# Altium PCB mainboardver2.PcbDoc
Units mil, origin at the board's own origin, x right, y up, seen from the top; angles counter-clockwise.
Board outline 3335 x 3855 mil, 2 copper layers (Top Layer, Bottom Layer); 28 components, 43 nets, 139 pads, 0 vias.
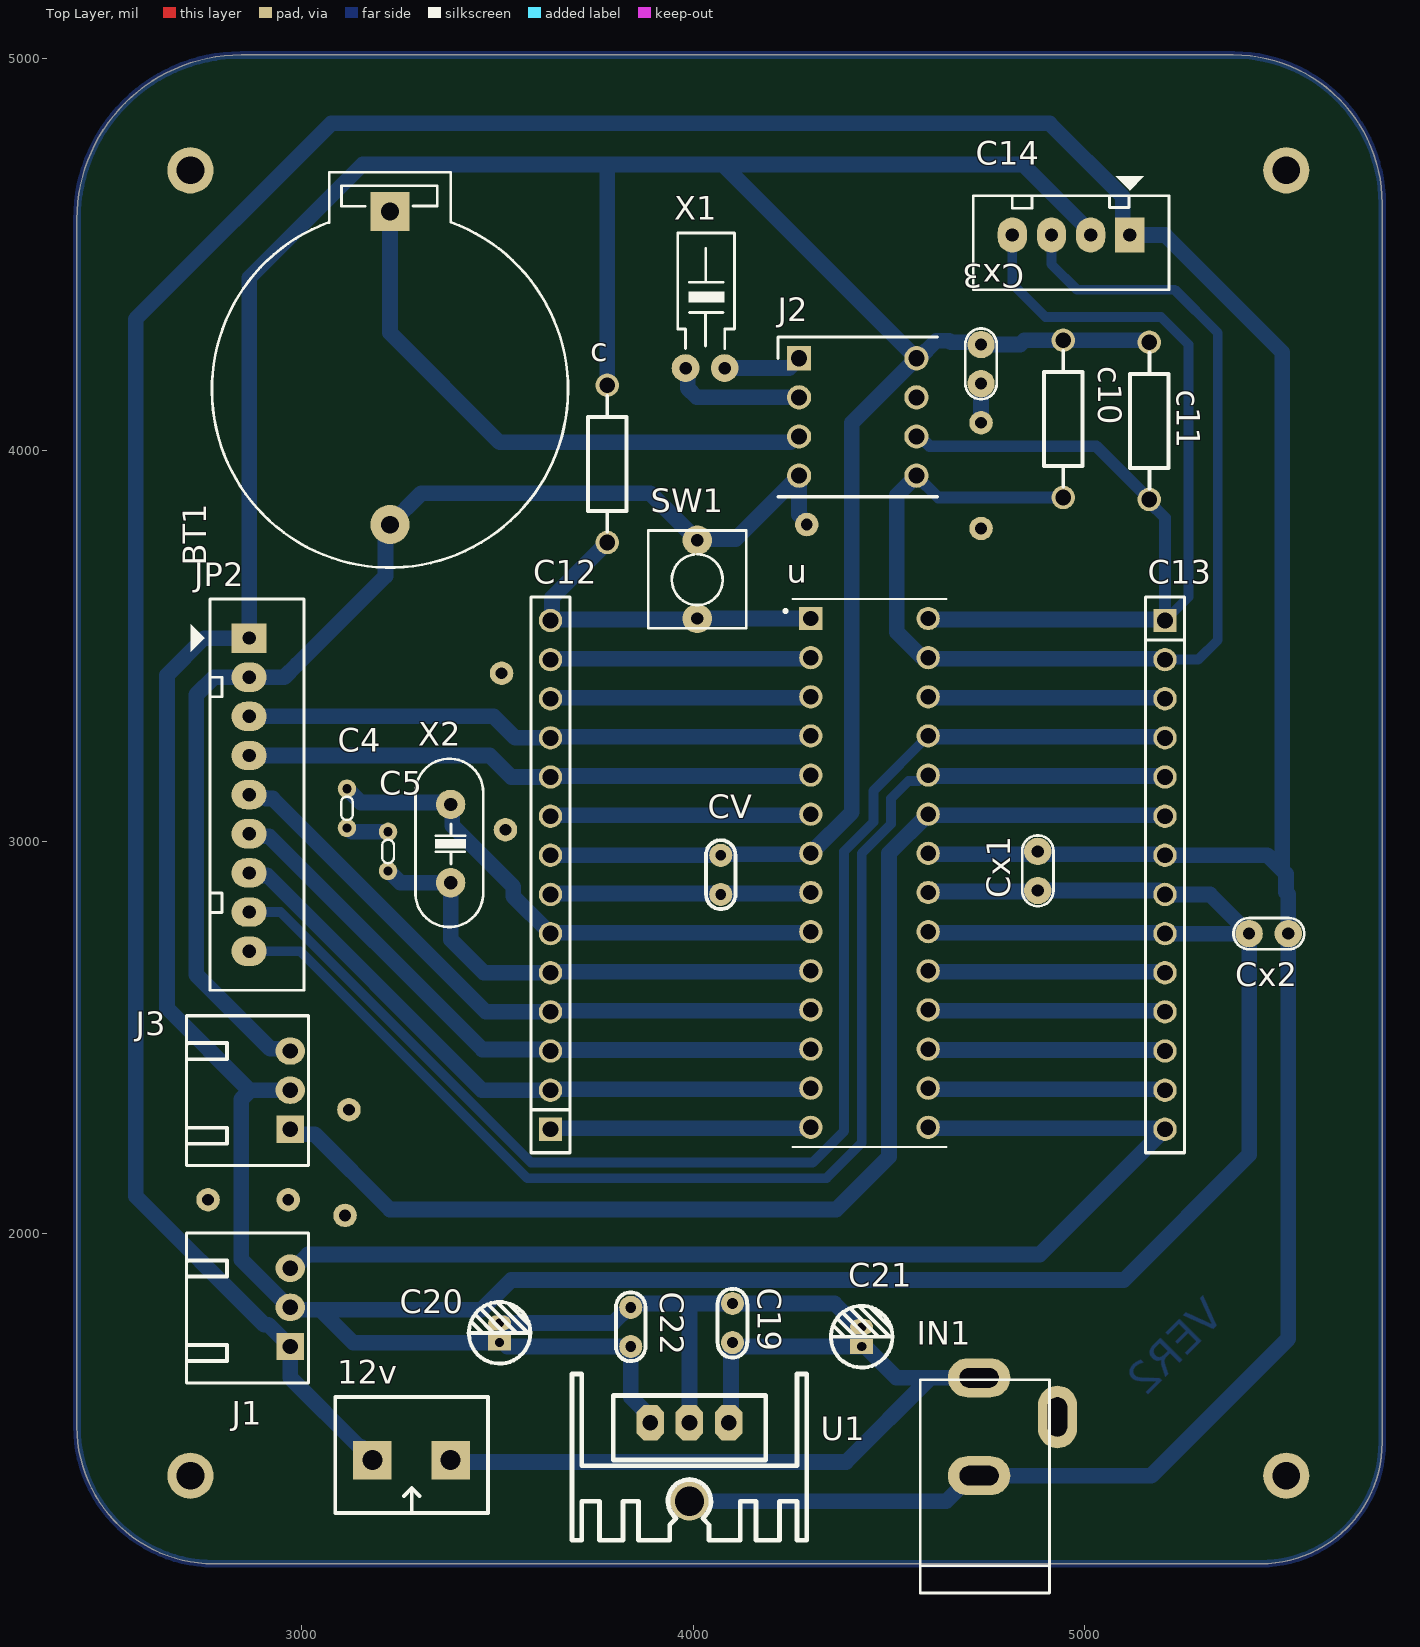
[diagram p0: Top Layer view]
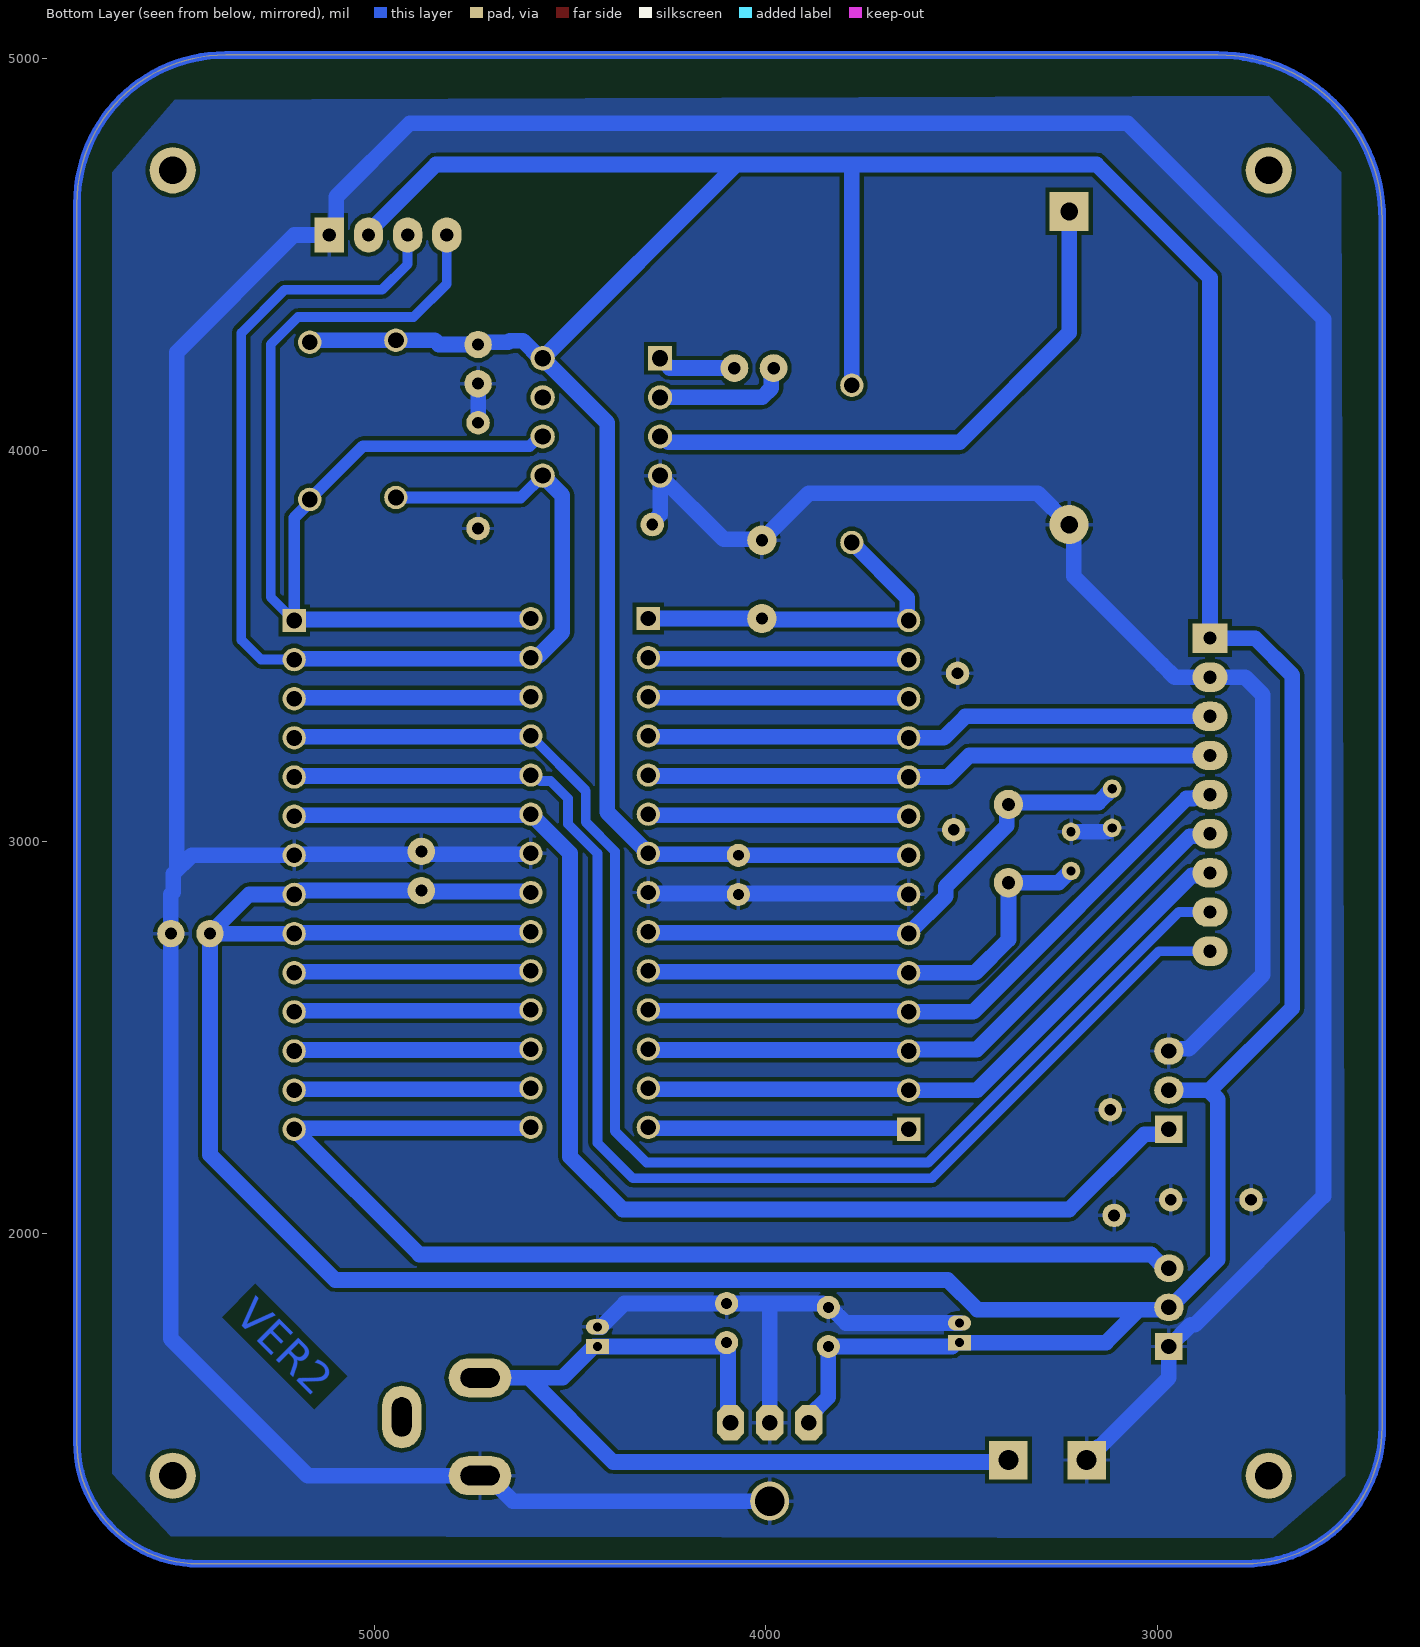
[diagram p1: Bottom Layer view, seen from below]
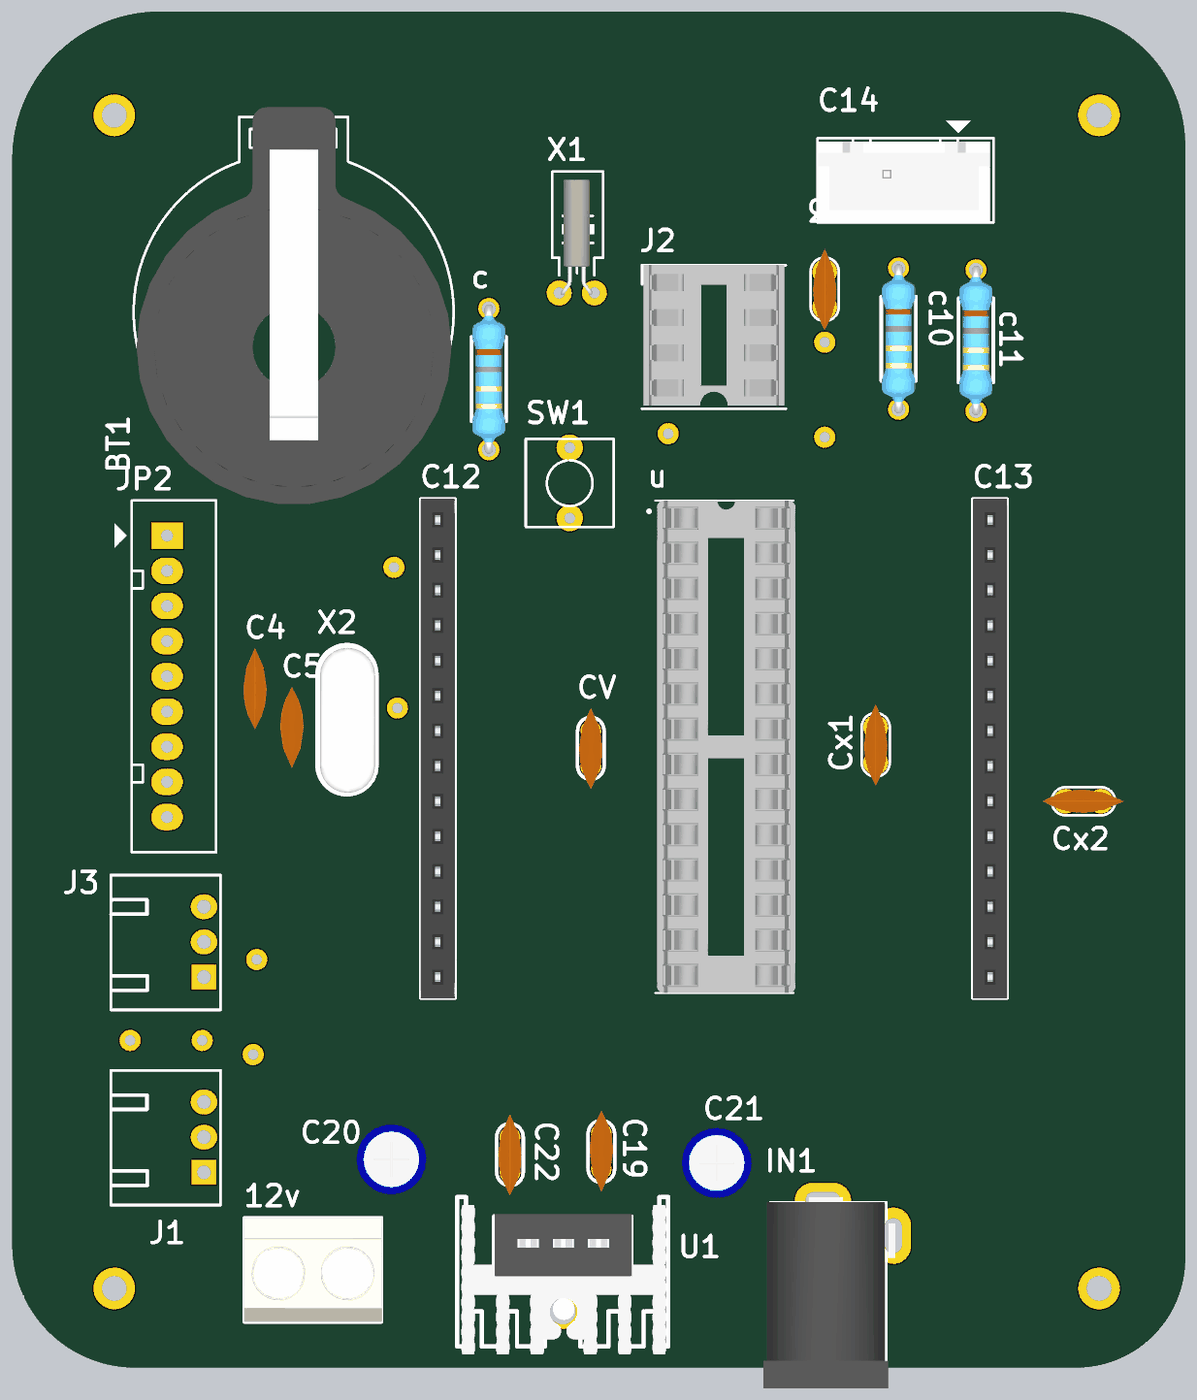
[diagram p2: 3D render of the assembled board from above, using the file's embedded part models]

## Layer stack, top to bottom
Top Solder: solder mask 0.4, Solder Resist, Dk 3.5
Top Layer: signal copper 1.4
Dielectric 1: dielectric 12.6, FR-4, Dk 4.8
Bottom Layer: signal copper 1.4
Bottom Solder: solder mask 0.4, Solder Resist, Dk 3.5

## Board outline
2425,1505 ccw(c2775,1505) 2775,1155 5450,1155 ccw(c5450,1465) 5760,1465 5760,4630 ccw(c5380,4630) 5380,5010 2845,5010 ccw(c2845,4590) 2425,4590

## Design rules (kind name [scope] priority, off if disabled: settings)
Clearance [All] p1: gap=10 ignorepadtopadclearanceinfootprint=FALSE except(0: Arc-Hole Track-Hole SMDPad-Hole THPad-Hole Via-Hole Fill-Hole Poly-Hole Region-Hole Text-Hole)
PolygonConnect [All] p1: connectstyle=Relief reliefconductorwidth=10 reliefentries=4 polygonreliefangle="90 Angle" airgapwidth=10
RoutingVias [All] p1: holewidth=28 width=50 viastyle="Through Hole" minholewidth=28 minwidth=50 maxholewidth=28 maxwidth=50
SolderMaskExpansion [All] p1: expansion=4 istentingtop=FALSE
Width [All] p1: maxlimit=40 minlimit=20 preferedwidth=25
30 further rules are at their usual default settings.

## Components (designator, comment, footprint, x,y, rotation, side; value= is the part's Value field where it differs from the comment)
12v "KF2" KF2-5.08 3280,1420 r180 top
BT1 "PIN 3V" PIN3V 3225,4610 r270 top
c "100K" "tro vach 1/4w" 3780,3965 r90 top
C4 "MH" Tu-pico 3115,3135 r270 top value=33p
C5 "MH" Tu-pico 3220,2925 r90 top value=33p
c10 "4,7K" "tro vach 1/4w" 4945,4080 r90 top
c11 "4,7K" "tro vach 1/4w" 5165,4075 r90 top
C12 "JP14" JP14-C1T 3635,2265 r90 top
C13 "JP14" JP14-C1T 5205,3565 r270 top
C14 "Header4" Header4 5115,4550 r180 top
C19 "104" "tu gom" 4100,1770 r90 top
C20 "10uF" "tu hoa 4mm" 3505,1745 r90 top
C21 "10uF" "tu hoa 4mm" 4430,1735 r90 top
C22 "104" "tu gom" 3840,1760 r270 top
CV "104" "tu gom" 4070,2915 r270 top
Cx1 "104" CN1 4880,2925 r90 top value=33pF
Cx2 "104" CN1 5470,2765 r0 top value=33pF
Cx3 "104" CN1 4735,4220 r90 top value=33pF
IN1 "Jac DC" DC0 4830,1505 r90 top
J1 "relay" "Header_Duc Cong_3P 2.54" 2970,1710 r270 top
J2 "A_08-LC-TT" DIPS762W61P254L1016H525Q8N 4270,4235 r0 top
J3 "sensor header" "Header_Duc Cong_3P 2.54" 2970,2265 r270 top
JP2 "JP9" Header9 2865,3520 r270 top value="Connector 9"
SW1 "" SW2 4010,3570 r90 top
u "1-2199298-9" DIP762W60P254L3556H510Q28 4450,2920 r0 top
U1 "LM7805" QTO-220H3 4090,1515 r180 top
X1 "32k" XT32k 3980,4210 r90 top value=4Mhz
X2 "16Mhz" XT2 3380,2995 r90 top value=4Mhz

## Footprints (in the part's own frame and the unit in brackets; to place one, negate y for a bottom-side part, rotate by r counter-clockwise, add the part's x,y. Pads: shape width x height; smd on the part's side, far side on the other; paste and mask are expansions set on the pad)
CN1 [mil]
  round 70 hole 31: 1(-50,0) 2(50,0)
  silkscreen extent -90,-40 91,40, body extent -115,-33 115,33, height 265
DC0 [mil] "Jac DC input"
  oval 100x160 hole 50 slot 100 at 90 deg: 1(125,100) 2(-125,100)
  oval 160x100 hole 50 slot 100 at 0 deg: 3(25,-100)
  silkscreen extent -425,-80 120,250, body extent -410,-105 134,269, height 434
DIP762W60P254L3556H510Q28 [mm]
  rect 1.508x1.508 hole 1: 1(-3.81,16.51)
  round 1.508 hole 1: 2(-3.81,13.97) 3(-3.81,11.43) 4(-3.81,8.89) 5(-3.81,6.35) 6(-3.81,3.81) 7(-3.81,1.27) 8(-3.81,-1.27) 9(-3.81,-3.81) 10(-3.81,-6.35) 11(-3.81,-8.89) 12(-3.81,-11.43) 13(-3.81,-13.97) 14(-3.81,-16.51) 15(3.81,-16.51) 16(3.81,-13.97) 17(3.81,-11.43) 18(3.81,-8.89) 19(3.81,-6.35) 20(3.81,-3.81) 21(3.81,-1.27) 22(3.81,1.27) 23(3.81,3.81) 24(3.81,6.35) 25(3.81,8.89) 26(3.81,11.43) 27(3.81,13.97) 28(3.81,16.51)
  silkscreen extent -5.55,-17.78 5,17.78, body extent -4.87,-17.78 5.13,17.78, height 5
DIPS762W61P254L1016H525Q8N [mm]
  rect 1.575x1.575 hole 1.05: 1(0,0)
  round 1.575 hole 1.05: 2(0,-2.54) 3(0,-5.08) 4(0,-7.62) 5(7.62,-7.62) 6(7.62,-5.08) 7(7.62,-2.54) 8(7.62,0)
  silkscreen extent -1.37,-8.99 8.99,1.37, body extent -1.27,-8.76 8.89,1.4, height 4.81
Header4 [mil] "CON4"
  rect 75x90 hole 34: 1(0,0)
  oval 75x90 hole 34: 2(100,0) 3(200,0) 4(300,0)
  silkscreen extent -100,-150 400,140, body extent -90,-90 398,136, height 276
Header9 [mil] "CON9"
  rect 75x90 hole 34: 1(0,0)
  oval 75x90 hole 34: 2(100,0) 3(200,0) 4(300,0) 5(400,0) 6(500,0) 7(600,0) 8(700,0) 9(800,0)
  silkscreen extent -100,-150 900,140
"Header_Duc Cong_3P 2.54" [mil]
  rect 70x70 hole 39.37 unplated: 1(0,0)
  oval 70x75 hole 39.37 unplated: 2(-100,0) 3(-200,0)
  silkscreen extent -290,-265 93,47
JP14-C1T [mm] "14 row, straight, gold plating"
  rect 1.52x1.52 hole 1.02: 1(0,0)
  round 1.52 hole 1.02: 2(2.54,0) 3(5.08,0) 4(7.62,0) 5(10.16,0) 6(12.7,0) 7(15.24,0) 8(17.78,0) 9(20.32,0) 10(22.86,0) 11(25.4,0) 12(27.94,0) 13(30.48,0) 14(33.02,0)
  silkscreen extent -1.52,-1.27 34.54,1.27, body extent -1.52,-1.25 34.54,1.25, height 8.51
KF2-5.08 [mm]
  rect 2.5x2.5 hole 1.3: 1(-2.54,0) 2(2.54,0)
  silkscreen extent -4.95,-4.08 4.95,3.43, body extent -5,-4.07 5,3.43, height 10
PIN3V [mil] "Socket PIN 3V"
  rect 100x100 hole 45: 1(0,0)
  round 100 hole 45: 2(800,0)
  silkscreen extent -100,-455 910,455, body extent -128,-447 1002,449, height 278
QTO-220H3 [mil] "TO-220 1-2-3"
  oct 70x90 hole 40: 1(0,0) 2(100,0) 3(200,0)
  round 100 hole 75: 2(100,200)
  silkscreen extent -200,-125 400,300, body extent -194,-102 388,323, height 984
SW2 [mil] "SW button 2pin, 250x 250 mil"
  round 75 hole 31: 1(0,0) 2(200,0)
  silkscreen extent -25,-125 225,125
"tro vach 1/4w" [mm]
  round 1.52 hole 1.02: 1(-5.1,0) 2(5.1,0)
  silkscreen extent -4.39,-1.25 4.42,1.25, body extent -5.38,-1.2 5.38,1.2, height 2.41
"tu gom" [mm] "Tu gom mini"
  round 1.5 hole 0.7: 1(-1.27,0) 2(1.27,0)
  silkscreen extent -2.25,-0.97 2.22,0.97, body extent -2.92,-0.85 2.92,0.85, height 6.12
"tu hoa 4mm" [mm]
  rect 1x1.5 hole 0.6: 1(-0.635,0)
  oval 1x1.5 hole 0.6: 2(0.635,0)
  silkscreen extent -2,-2 2.01,2.01, body extent -2.47,-2.47 2.58,2.58, height 14.81
Tu-pico [mm] "Tu gom mini"
  round 1.2 hole 0.6: 1(0,0) 2(2.54,0)
  silkscreen extent 0.51,-0.38 2.03,0.38, body extent -1.65,-0.85 4.19,0.85, height 6.12
XT2 [mil] "Footpin for Crystal 2 pin"
  round 75 hole 34: 1(-100,0) 2(100,0)
  silkscreen extent -213,-83 217,90, body extent -216,-87 216,90, height 144
XT32k [mm]
  round 1.8 hole 0.813: 1(0,0) 2(0,-2.54)
  silkscreen extent 1.27,-3.17 8.76,0.51, body extent -0.15,-2.42 8.2,-0.12, height 1.95

## Part data
12v: Manufacturer="Würth Elektronik eiSos GmbH", partNo=691103110002, ComponentLink1 Description=Manufacturer, ComponentLink1URL=http://www.we-online.com, ComponentLink2 Description=Datasheet, ComponentLink2URL=http://katalog.we-online.de/em/datasheet/6911031100xx.pdf, Created by="Karrer Zheng", Created Date="29 October 2013", NoPins=2
BT1: "Battery 3VDC"
c c10 c11: library part "Tro Vach 1/4W 5% 10k", "Căm", Chung_Loai=Cắm, Don_Vi=Con, Ma_Hang=MH007354, So_Chan=2, Ten_Linh_Kien="Trở Vạch 1/4w 5% 10K"
C4 C5: library part "Tu 33pF", "Cắm"
C12 C13: "WR-PHD 2.54 mm Angled Socket Header", Manufacturer="W¨¹rth Elektronik eiSos GmbH", partNo=613014143121, ComponentLink1 Description=Manufacturer, ComponentLink1URL=http://www.we-online.com, ComponentLink2 Description=Datasheet, ComponentLink2URL=http://katalog.we-online.de/em/datasheet/6130xx143121.pdf, Created by="Karrer Zheng", Created Date="29 March 2013", NoPins=14
C14: "Header IDC, 4 x 1 Pin Vertical 2.54mm Pitch (Non-Boxed, Male)", Manufacturer="W¨¹rth Elektronik eiSos GmbH", partNo=613002143121, ComponentLink1 Description=Manufacturer, ComponentLink1URL=http://www.we-online.com, ComponentLink2 Description=Datasheet, ComponentLink2URL=http://katalog.we-online.de/em/datasheet/6130xx143121.pdf, Created by="Karrer Zheng", Created Date="29 March 2013", NoPins=02
C19 C22 CV: library part "Tu gom 104 50V", "Cắm", Chung_Loai=Cắm, Don_Vi=Con, Ma_Hang=MH004761, So_Chan=2, Ten_Linh_Kien="Tụ gốm 104 100nF 50V"
C20 C21: library part "Tu Hoa 10uF 16V 4x7", "Cắm", Chung_Loai=Cắm, Don_Vi=Con, Ma_Hang=MH006855, So_Chan=2, Ten_Linh_Kien="Tụ Hóa 10uF 16V"
Cx1 Cx2 Cx3: library part CN0, "Cremic For Xtal 1pF => 100pF"
IN1: library part DCIN, "Jac DC input"
J1 J3: library part "Header 1_2.54_3P", "Cắm", Chung_Loai=Cắm
J2: "8 (2 x 4) Pos DIP, 0.3 (7.62mm) Row Spacing Socket Tin Through Hole", Package=None, Availability=Unavailable, MF="Assmann WSW Components", MP="A 08-LC-TT", Price=None, SnapEDA_Link=https://www.snapeda.com/parts/A%2008-LC-TT/Assmann%20WSW%20Components/view-part/3092960/?ref=snap
JP2: library part Header9, "Connector 9"
SW1: library part "Nut Nhan 2 Chan ( Dip )", "Cắm", Chung_Loai=Cắm, Don_Vi=Con, Ma_Hang=MH001959, Ten_Linh_Kien="Nút Nhấn 2 Chân 6x6x5MM DIP"
u: "28P,DIP SKT,300 CL,LDR,PB FREE", Package="PDIP-28 TE Connectivity", Centerline_Pitch="2.54 mm[.1 in]", ComponentLink1Description="New link", Digi-Key_Part_Number=A120353-ND, EU_RoHS_Compliance=Compliant, MF="TE Connectivity", MP=1-2199298-9, Number_of_Positions=28, Product_Type=Socket, SnapEDA_Link=https://www.snapeda.com/parts/1-2199298-9/TE%20Connectivity%20AMP%20Connectors/view-part/1265789/?ref=snap
U1: library part LM78xx, "On ap +, from + 5 to + 24VDC"
X1 X2: library part XT2, "Crystal, 32.768 KHz, -40 to 85 degC, 3.2 x 1.5 x 0.9 mm SMD"

## Free pads (board coordinates)
  round 60 hole 30: 9(2760,2085) 9(2965,2085) 9(3110,2045) 9(3120,2315) 9(3510,3430) 9(3520,3030) 9(4290,3810) 9(4735,3800) 9(4735,4070)
  round 118.11 hole 70.87: 14(2715,1380) 14(2715,4715) 14(5515,1380) 14(5515,4715)

## Nets (pads, with @x,y where several pads share a name; then routed paths per layer and width w, separated by ;. In a path a pad name is that pad's centre, name@x,y a point inside that pad or via, vN(x,y) a via of type N, cw(c..) or ccw(c..) an arc to the next point about the centre after c; other vN are vias at no path point)
Net12v_1: 12v.1 C19.1 C21.1 IN1.1 U1.1 | length 2192.5
  Bottom Layer w40: 12v.1 3385,1415 4390,1415 4605,1630 ; U1.1 4096.35,1521.35 4096.35,1716.35 C19.1 4105.16,1720 4115.16,1710 C21.1 4439.21,1710 4519.21,1630 4605,1630 ; IN1.1 4605,1630
Net12v_2: 12v.2 BT1.2 C4.2 C5.2 C12.7 C13.7 C14.1 C19.2 C20.2 C21.2 C22.1 CV.2 Cx1.2 Cx2.2 Cx3.1 IN1.2 J1.1 J2.4 J3.3 JP2.2 pad.9@2760,2085 pad.9@2965,2085 pad.9@3110,2045 pad.9@3120,2315 pad.9@3510,3430 pad.9@3520,3030 pad.9@4735,3800 SW1.2 U1.2 u.8 u.22 | length 17023.9
  Bottom Layer w40: J3.3 2964.26,2470.74 2919.26,2470.74 2730,2660 2730,3375 2775,3420 JP2.2 2955,3420 2987.5,3452.5 3213.52,3678.52 3213.52,3798.52 BT1.2 3305,3890 3890,3890 SW1.2 4012.5,3772.5 4107.5,3772.5 J2.4 4270,3835.41 4290,3815.41 4290,3810 ; C4.2@3116.39,3033.61 C4.2 3116.96,3035 3126.96,3025 C5.2 ; 12v.2@3150.79,1454.21 12v.2@3150.79,1449.21 ; 12v.2 12v.2@3150.79,1449.21 ; C20.2 3794.84,1770 3834.84,1810 C22.1 3845.16,1810 3855.16,1820 3977.58,1820 ; C12.7 3637.5,2867.5 4055,2867.5 4297.5,2867.5 u.8 ; U1.2@3990,1315 4646.57,1315 4711.57,1380 5170,1380 5520,1730 Cx2.2 5520,2865 5514.26,2870.74 5514.26,2917.31 5466.57,2965 C13.7 5202.5,2967.5 4880,2967.5 4602.5,2967.5 u.22 ; U1.2@3990,1515 3990,1807.58 3977.58,1820 ; C21.2 4420.79,1760 4360.79,1820 C19.2 3977.58,1820 ; 4735,4070 Cx3.1 ; 5505,2926.57 5505,4250 5205,4550 C14.1 5097.5,4567.5 5097.5,4647.5 4910,4835 3075,4835 2575,4335 2575,2094.29 2903.55,1765.74 2914.26,1765.74 J1.1 2970,1630 12v.2@3150.79,1449.21
NetBT1_1: BT1.1 J2.3 | length 1477.2
  Bottom Layer w40: BT1.1 3225,4300 3505,4020 4249.04,4020 4264.04,4035 J2.3
NetC3_1: C12.1 u.14 | length 667.1
  Bottom Layer w40: C12.1 3637.5,2267.5 4297.5,2267.5 u.14
NetC3_2: C12.2 JP2.7 u.13 | length 1667
  Bottom Layer w40: JP2.7 2871.7,2913.3 2911.7,2913.3 3460,2365 C12.2 3637.5,2367.5 4297.5,2367.5 u.13
NetC3_3: C12.3 JP2.6 u.12 | length 1667
  Bottom Layer w40: JP2.6 2871.7,3013.3 2916.7,3013.3 3461.2,2468.8 3631.2,2468.8 C12.3 3637.5,2467.5 4297.5,2467.5 u.12
NetC3_4: C12.4 JP2.5 u.11 | length 1667
  Bottom Layer w40: JP2.5 2871.7,3113.3 2903.95,3113.3 2907.25,3110 2925,3110 3470,2565 C12.4 3637.5,2567.5 4297.5,2567.5 u.11
NetC3_5: C5.1 C12.5 u.10 X2.1 | length 1274.7
  Bottom Layer w40: C5.1 3221.96,2925 3251.96,2895 X2.1 3380,2750 3465,2665 C12.5 3637.5,2667.5 4297.5,2667.5 u.10
NetC3_6: C4.1 C12.6 u.9 X2.2 | length 1384.3
  Bottom Layer w40: C4.1 3150,3100 3375,3100 3383.94,3091.06 3383.94,3041.06 3540,2885 3540,2860 C12.6 3637.5,2767.5 4297.5,2767.5 u.9
NetC3_8: c10.2 c11.2 C12.8 C13.8 C13.9 C14.2 C20.1 C22.2 c.2 CV.1 Cx1.1 Cx2.1 Cx3.2 J1.2 J2.8 J3.2 JP2.1 U1.3 u.7 u.20 u.21 | length 15249.7
  Bottom Layer w40: 2866.72,2363.28 2655,2575 2655,3425 2750,3520 JP2.1 2865,4440 3155,4730 3780,4730 ; J3.2 2868.43,2365 2845,2341.57 2845,1932.5 2967.5,1810 J1.2 2975.74,1804.26 3046.45,1804.26 ; C12.8@3637.5,2967.5 C12.8 CV.1 4072.5,2967.5 4297.5,2967.5 u.7 4405,3075 4405,4070 J2.8 ; c.2 3780,4730 ; U1.3 3890,1530.78 3840,1580.78 C22.2 3524.21,1710 3514.21,1720 C20.1 3130.71,1720 3046.45,1804.26 ; u.20 4602.5,2767.5 5202.5,2767.5 C13.9 Cx2.1 ; u.21@4602.5,2867.5 u.21 4602.5,2872.5 4877.5,2872.5 Cx1.1 5189.63,2875 5199.63,2865 C13.8 ; C14.2 5015,4557.5 4842.5,4730 4075,4730 ; c11.2 5160.91,4275.79 5155.91,4280.79 c10.2 4845.96,4280.79 4835.17,4270 Cx3.2 4729.26,4275.74 4658.35,4275.74 4654.09,4280 4620.96,4280 4575.96,4235 J2.8 ; C13.8@5202.5,2867.5 C13.8 ; 3046.45,1804.26 3459.15,1804.26 3534.89,1880 5100,1880 5420,2200 Cx2.1 ; 3780,4730 4075,4730 ; 4075,4730 J2.8 ; C13.8 5320,2865 Cx2.1
NetC3_9: C12.9 u.6 | length 667.1
  Bottom Layer w40: C12.9 3637.5,3067.5 4297.5,3067.5 u.6
NetC3_10: C12.10 JP2.4 u.5 | length 1459.9
  Bottom Layer w40: JP2.4 3480,3220 3535,3165 C12.10 3637.5,3167.5 4297.5,3167.5 u.5
NetC3_11: C12.11 JP2.3 u.4 | length 1459.9
  Bottom Layer w40: JP2.3 3490,3320 3545,3265 C12.11 3637.5,3267.5 4297.5,3267.5 u.4
NetC3_12: C12.12 u.3 | length 667.1
  Bottom Layer w40: C12.12 3637.5,3367.5 4297.5,3367.5 u.3
NetC3_13: C12.13 u.2 | length 667.1
  Bottom Layer w40: C12.13 3637.5,3467.5 4297.5,3467.5 u.2
NetC3_14: C12.14 c.1 SW1.1 u.1 | length 922.8
  Bottom Layer w40: C12.14 C12.14@3637.5,3567.5 ; c.1 3638.8,3623.01 3638.8,3568.8 C12.14@3637.5,3567.5 ; u.1 SW1.1 4007.5,3567.5 C12.14@3637.5,3567.5
Netc8_1: 
NetC9_1: c11.1 C13.1 C14.4 J2.6 u.28 | length 2963.5
  Bottom Layer w25: C14.4 4815,4425 4900,4340 5195,4340 5265,4270 5265,3625 C13.1
  Bottom Layer w30: J2.6 4578.58,4035 4603.58,4010 5029.21,4010 c11.1 5165,3867.42 5205,3827.42 C13.1
  Bottom Layer w40: u.28 4602.5,3567.5 5202.5,3567.5 C13.1
NetC9_2: c10.1 C13.2 C14.3 J2.5 u.27 | length 3046
  Bottom Layer w25: C14.3 4915,4475 4980,4410 5230,4410 5340,4300 5340,3515 5290,3465 C13.2
  Bottom Layer w30: J2.5 4625.79,3879.21 c10.1
  Bottom Layer w40: J2.5 4520,3885 4520,3535 4581.29,3473.71 4596.29,3473.71 4602.5,3467.5 5202.5,3467.5 C13.2
NetC9_3: C13.3 u.26 | length 607.1
  Bottom Layer w40: u.26 4602.5,3367.5 5202.5,3367.5 C13.3
NetC9_4: C13.4 JP2.8 u.25 | length 3524.4
  Bottom Layer w25: JP2.8 2944.9,2820 3584.9,2180 4305,2180 4385,2260 4385,2975 4460,3050 4460,3130 u.25
  Bottom Layer w40: u.25 4602.5,3267.5 5202.5,3267.5 C13.4
NetC9_5: C13.5 JP2.9 u.24 | length 3480.5
  Bottom Layer w25: JP2.9 2995.4,2720 3575.4,2140 4340,2140 4430,2230 4430,2970 4505,3045 4505,3110 4549.99,3154.99 4575.69,3154.99 4590.7,3170 u.24
  Bottom Layer w40: u.24 4602.5,3167.5 5202.5,3167.5 C13.5
NetC9_6: C13.6 J3.1 u.23 | length 3194.3
  Bottom Layer w40: J3.1 2982.43,2252.57 3032.43,2252.57 3225,2060 4365,2060 4500,2195 4500,2970 u.23 4602.5,3067.5 5202.5,3067.5 C13.6
NetC9_10: C13.10 u.19 | length 607.1
  Bottom Layer w40: u.19 4602.5,2667.5 5202.5,2667.5 C13.10
NetC9_11: C13.11 u.18 | length 607.1
  Bottom Layer w40: u.18 4602.5,2567.5 5202.5,2567.5 C13.11
NetC9_12: C13.12 u.17 | length 607.1
  Bottom Layer w40: u.17 4602.5,2467.5 5202.5,2467.5 C13.12
NetC9_13: C13.13 u.16 | length 607.1
  Bottom Layer w40: u.16 4602.5,2367.5 5202.5,2367.5 C13.13
NetC9_14: C13.14 J1.3 u.15 | length 2989.1
  Bottom Layer w40: J1.3 2980.62,1910 3015.62,1945 4885,1945 C13.14 5202.5,2267.5 4602.5,2267.5 u.15
NetC15_1: 
NetC15_2: 
NetC16_2: 
NetC17_2: 
NetC18_2: 
NetJ2_1: J2.1 X1.2 | length 200.4
  Bottom Layer w40: X1.2 4245,4210 J2.1
NetJ2_2: J2.2 X1.1 | length 347.8
  Bottom Layer w40: X1.1 3985.91,4204.09 3985.91,4158.43 4009.34,4135 J2.2
NetJP1_1: 
NetJP1_2: 
NetJP1_3: 
NetJP1_9: 
NetLED2_1: 
NetLED3_1: 
NetLED4_1: 
NetLED5_1: 
pads on no net: IN1.3 J2.7
copper on no net: | length 13753.4
  Bottom Layer w19.68: 2425,1505 ccw(c2775,1505) 2775,1155 5450,1155 ccw(c5450,1465) 5760,1465 5760,1814.45 5760,4630 ccw(c5380,4630) 5380,5010 2845,5010 ccw(c2845,4590) 2425,4590 2425,1505

## Polygon pours and split planes (outlines as drawn)
Net12v_2 on Bottom Layer "gnd1" (solid, remove dead copper, pour order 0): 2520,1380 2705,1220 5520,1225 5670,1385 5670,4710 5510,4895 2715,4905 2530,4710 2520,1375

## Other copper
Bottom Layer:
  text "VER2" at 5360.86,1785 h80 r45